# Altium PCB MCU.PcbDoc (part 2 of 2)
Units mm, origin at the board's own origin, x right, y up, seen from the top; angles counter-clockwise.
Board outline 79.5 x 68.58 mm, 2 copper layers (Top Layer, Bottom Layer); 52 components, 35 nets, 217 pads, 51 vias.
Unrouted connection lines stored in the file: 1.
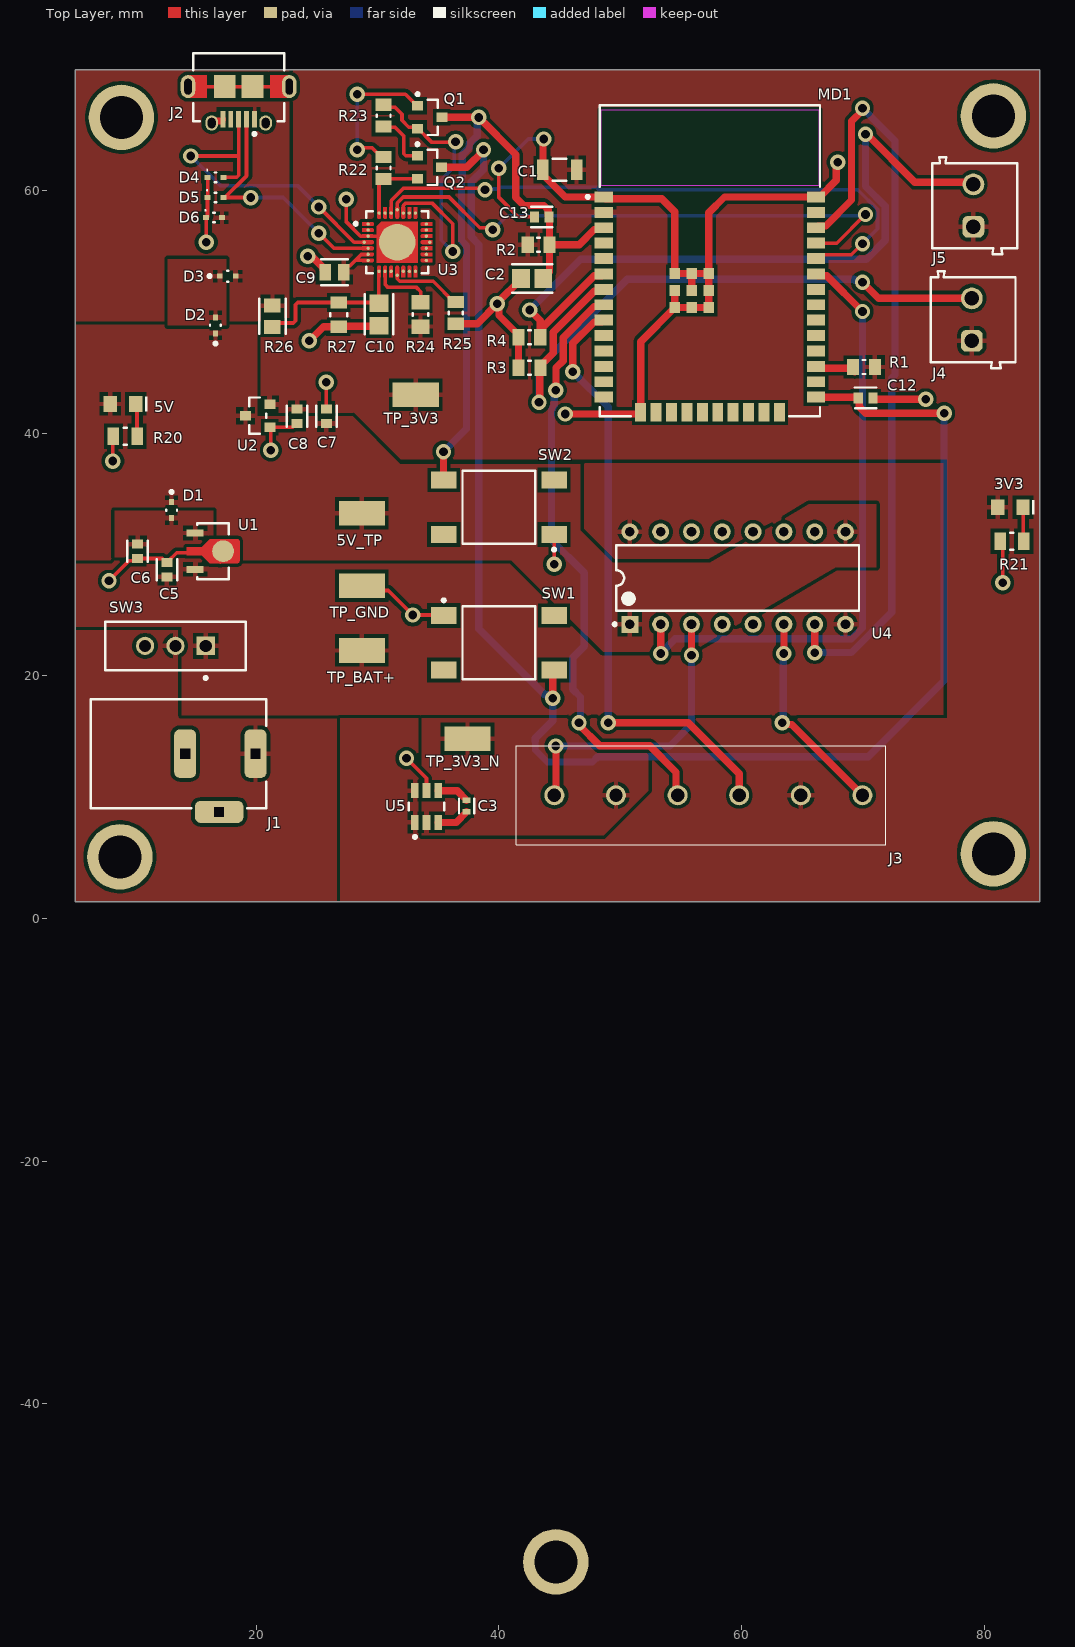
[diagram p0: Top Layer view]

## Part data (continued)
R24: library part CMP-2100-03671-1, "Chip Resistor, 1 KOhm, +/- 1%, 125 mW, -55 to 155 degC, 0805 (2012 Metric), RoHS, Tape and Reel", Case Code (Imperial)=0805, Case Code (Metric)=2012, Manufacturer=Yageo, Max Operating Temperature=155degC, Max Power Dissipation=125mW, Min Operating Temperature=-55degC, Package Description="2-Pin Surface Mounted Device, Body 2 x 1.25 mm", Package Height=0.5mm, Package Length=2mm, Package Quantity=1, Package Shape=Rectangular, Package Style=SMTMeter, Package Width=1.25mm, Rated Temperature=70°C, Resistance=1KOhm, Resistor Type="FIXED RESISTOR", Supplier Part Number=311-1.00KCRCT-ND, Temperature Coefficient=100ppm/degreesC, Tolerance=1%, Voltage Rating=150V, Additional Feature="LASER TRIMMABLE", Case/Package=0805, Category="Chip SMD Resistors", ComponentLink1Description=https://datasheet.ciiva.com:443/pdfs/VipMasterIC/IC/YAGO/YAGO-S-A0008145938/YAGO-S-A0008145938-1.pdf?src-supplier=IHS+Markit, ComponentLink1URL=https://datasheet.ciiva.com:443/pdfs/VipMasterIC/IC/YAGO/YAGO-S-A0008145938/YAGO-S-A0008145938-1.pdf?src-supplier=IHS+Markit, ComponentLink2Description=https://datasheet.ciiva.com/7941/1686128-7941719.pdf?src-supplier=Element14, ComponentLink2URL=https://datasheet.ciiva.com/7941/1686128-7941719.pdf?src-supplier=Element14, ComponentLink3Description=https://datasheet.ciiva.com/46385/444164-46385020.pdf?src-supplier=Element14, ComponentLink3URL=https://datasheet.ciiva.com/46385/444164-46385020.pdf?src-supplier=Element14, ComponentLink4Description=https://datasheet.ciiva.com/2456/pyu-r-int-thick-7-2456976.pdf?src-supplier=Digikey, ComponentLink4URL=https://datasheet.ciiva.com/2456/pyu-r-int-thick-7-2456976.pdf?src-supplier=Digikey, ComponentLink5Description=https://datasheet.ciiva.com/2456/pyu-r-int-thick-7-2456977.pdf?src-supplier=Digikey, ComponentLink5URL=https://datasheet.ciiva.com/2456/pyu-r-int-thick-7-2456977.pdf?src-supplier=Digikey, ComponentLink6Description=https://datasheet.ciiva.com/2456/pyu-r-int-thick-7-2456975.pdf?src-supplier=Digikey, ComponentLink6URL=https://datasheet.ciiva.com/2456/pyu-r-int-thick-7-2456975.pdf?src-supplier=Digikey, ComponentLink7Description=https://datasheet.ciiva.com/16850/rc0805-16850409.pdf?src-supplier=Future+Electronics, ComponentLink7URL=https://datasheet.ciiva.com/16850/rc0805-16850409.pdf?src-supplier=Future+Electronics, Composition=ThickFilm, Construction=Chip, Datasheet URL=http://www.yageo.com/NewPortal/yageodocoutput?fileName=/pdf/R-Chip/PYu-RC_Group_51_RoHS_L_5.pdf, Datasheet Version="Rev. 5, 10/2016", Depth=1.25mm, Height=0.024inch, JESD-609 Code=e3, Lead Free=LeadFree, Length=0.079inch, Manufacturer Part Number=RC0805FR-071KL, Manufacturer URL=http://www.yageo.com/, Military Standard=Not, Mounting Technology="Surface Mount", Number of Pins=2, Number of Terminations=2, Package Reference=0805, Packaging=TapeandReel, Pins=2, Power=125mW, Power Rating=125mW, Pricing="1=0.1, 10=0.025, 50=0.016, 100=0.0133, 500=0.00912, 1000=0.00787 (USD)", REACH SVHC=Unknown, Reach SVHC Compliant=Yes, RoHS=Yes, RoHS Compliant=Yes, RoHSCompliant=true, Stock=3362703, Supplier=Digikey, Technology="METAL GLAZE/THICK FILM", Terminal Finish=Nickel, Termination=SMD/SMT, Voltage Rating (DC)=150V, Width=0.049inch, Working Voltage=150V
R26: library part CMP-26527-001411-1, "22.1kΩ ±1% 0.125W 0805 Thick Film Chip Resistor AEC-Q200 compliant", Case Code (Imperial)=0805, Case Code (Metric)=2012, Manufacturer="Stackpole Electronics", Max Operating Temperature=155°C, Max Power Dissipation=125mW, Min Operating Temperature=-55°C, Package Height=0.5mm, Package Length=2mm, Package Shape=Rectangular, Package Style=SMTMeter, Package Width=1.25mm, Rated Temperature=70°C, Resistance=22.1kR, Resistor Type="Thick Film", Supplier Part Number=RMCF0805FT22K1CT-ND, Temperature Coefficient=100ppm/°C, Tolerance=1%, Working Voltage=150V, Case/Package=0805, Category="Chip SMD Resistors", ComponentLink1Description=https://datasheet.ciiva.com:443/pdfs/VipMasterIC/IC/SEIE/SEIE-S-A0009541969/SEIE-S-A0009541969-1.pdf?src-supplier=IHS+Markit, ComponentLink1URL=https://datasheet.ciiva.com:443/pdfs/VipMasterIC/IC/SEIE/SEIE-S-A0009541969/SEIE-S-A0009541969-1.pdf?src-supplier=IHS+Markit, ComponentLink2Description=https://datasheet.ciiva.com/15193/getdatasheetpartid-409700-15193558.pdf?src-supplier=Verical, ComponentLink2URL=https://datasheet.ciiva.com/15193/getdatasheetpartid-409700-15193558.pdf?src-supplier=Verical, Construction=Rectangular, Contact Plating=Tin, Depth=1.25mm, Features="Automotive AEC-Q200", Height=0.026inch, JESD-609 Code=e3, Lead Free="Lead Free", Length=0.079inch, Manufacturer Part Number=RMCF0805FT22K1, Military Standard=Not, Mount="Surface Mount", Mounting Technology="Surface Mount", Number of Terminations=2, Packaging="Tape and Reel", Pins=2, Power=125mW, Power Rating=125mW, Pricing="1=0.1, 10=0.02, 50=0.0124, 100=0.0103, 500=0.007, 1000=0.00601 (USD)", Radiation Hardening=No, Reach SVHC Compliant=Yes, Reference Standard=AEC-Q200, RoHS=Yes, RoHS Compliant=Yes, Series=RMCF, Size Code=0805, Stock=745768, Supplier=Digikey, Technology="METAL GLAZE/THICK FILM", Terminal Finish=Nickel, Termination=Wraparound, Width=0.049inch
R27: library part CMP-03211-007667-1, "SMD Chip Resistor, Thin Film, 47.5KΩ, 100 V, 0805 [2012 Metric], 100 mW, 0.1%, RN73 Series", Case/Package=0805, Manufacturer="TE Connectivity", Manufacturer Series=RN73, Max Operating Temperature=125°C, Min Operating Temperature=-55°C, Package=RN732A, Package Shape=Rectangular, Power=100mW, Power Rating=0.1W, Rated Temperature=70°C, Resistance=47.5KΩ, Resistor Type="FIXED RESISTOR", Supplier Part Number=A119902CT-ND, Temperature="-55°C to 155°C", Temperature Coefficient=10ppm/°C, Temperature Range High=155°C, Tolerance=0.1%, Voltage Rating=100V, Additional Feature=PRECISION, Automotive=No, Category=Res, ComponentLink1Description=https://datasheet.ciiva.com:443/pdfs/VipMasterIC/IC/TYEC/TYECS00448/TYECS00448-1.pdf?src-supplier=IHS+Markit, ComponentLink1URL=https://datasheet.ciiva.com:443/pdfs/VipMasterIC/IC/TYEC/TYECS00448/TYECS00448-1.pdf?src-supplier=IHS+Markit, ComponentLink2Description=Datasheet, ComponentLink2URL=https://www.te.com/commerce/DocumentDelivery/DDEController?Action=showdoc&DocId=Data+Sheet%7F1773270%7FP%7Fpdf%7FEnglish%7FENG_DS_1773270_P.pdf%7F1676162-2, ComponentLink3Description=https://datasheet.ciiva.com/2547/eng-ds-1773270-m-2547934.pdf?src-supplier=Digikey, ComponentLink3URL=https://datasheet.ciiva.com/2547/eng-ds-1773270-m-2547934.pdf?src-supplier=Digikey, Composition="Thin Film", Device Class L1="Passive Components", Device Class L2=Resistors, Device Class L3="Chip SMD Resistors", Height=0.65mm, Ipc Land Pattern Name=RESC200125X55, Lead Free=Yes, Manufacturer Part Number=RN73C2A47K5BTD, Mounting Technology="Surface Mount", Octopart=https://octopart.com/rn73c2a47k5btd-te+connectivity-22736876, octopart_url=https://octopart.com/rn73c2a47k5btd-te+connectivity-22736876, Packaging="5000 Reel", Pins=2, Pricing="1=0.73, 10=0.521, 50=0.3986, 100=0.3526, 500=0.26204, 1000=0.22944 (USD)", RoHS=TRUE, RoHS Compliant=Yes, Series=RN73, Stock=2760, Supplier=Digikey, Technology="THIN FILM", Temperature Range Low=-55°C, Termination=Wraparound, Working Voltage=100V
SW1 SW2: library part CMP-2000-07486-1, "Micro Miniature Push Button Switch FSM JSM, 50 mA, -35 to 85 degC, 4-Pin SMD, RoHS, Tape and Reel", Capacitance=0f, Case\/Package=SMD/SMT, Contact Current Rating=50mA, Contact DC Max Rating R Load=.05A@12VDC, Contact Resistance=100mOhm, Contact Voltage(DC)-Max=12V, Manufacturer="TE Connectivity", Max Operating Temperature=85degC, Min Operating Temperature=-35degC, Operating Force=160gf, Operating Force-Max=2.06N, Package Description="4-Pin Surface Mount Device, Body 6 x 6 mm, Pitch 4.5 mm", Package Quantity=1200, Supplier Part Number=450-1759-1-ND, Voltage Rating (DC)=24V, Actuator Length=0.055inch, Actuator Material=Polyamide, Body Breadth=6inch, Body Height=3.6mm, Body Length or Diameter=6mm, Category="Pushbutton Switches", Circuit Configuration=1X1, ComponentLink1Description=https://datasheet.ciiva.com:443/pdfs/VipMasterIC/IC/TYEL/TYEL-S-A0008743874/TYEL-S-A0008712894-1.pdf?src-supplier=IHS+Markit, ComponentLink1URL=https://datasheet.ciiva.com:443/pdfs/VipMasterIC/IC/TYEL/TYEL-S-A0008743874/TYEL-S-A0008712894-1.pdf?src-supplier=IHS+Markit, ComponentLink2Description=https://datasheet.ciiva.com/5801/eng-cd-2-1437565-7-u2-5801346.pdf?src-supplier=Farnell, ComponentLink2URL=https://datasheet.ciiva.com/5801/eng-cd-2-1437565-7-u2-5801346.pdf?src-supplier=Farnell, ComponentLink3Description=https://datasheet.ciiva.com/23765/1486934-23765878.pdf?src-supplier=Newark, ComponentLink3URL=https://datasheet.ciiva.com/23765/1486934-23765878.pdf?src-supplier=Newark, ComponentLink4Description=https://datasheet.ciiva.com/1530/1683375-1530944.pdf?src-supplier=Element14, ComponentLink4URL=https://datasheet.ciiva.com/1530/1683375-1530944.pdf?src-supplier=Element14, ComponentLink5Description=https://datasheet.ciiva.com/16320/eng-cs-1308111-1-switches-core-program-catalog-0308-16320065.pdf?src-supplier=Future+Electronics, ComponentLink5URL=https://datasheet.ciiva.com/16320/eng-cs-1308111-1-switches-core-program-catalog-0308-16320065.pdf?src-supplier=Future+Electronics, ComponentLink6Description=https://datasheet.ciiva.com/7638/921681-7638037.pdf?src-supplier=Element14, ComponentLink6URL=https://datasheet.ciiva.com/7638/921681-7638037.pdf?src-supplier=Element14, Contact Current(DC)-Max=50mA, Contact Material=CopperAlloy, Contact Plating=Silver, Current Rating=50mA, Datasheet URL=http://www.te.com/commerce/DocumentDelivery/DDEController?Action=showdoc&DocId=Customer+Drawing%7F2-1437565-7%7FV%7Fpdf%7FEnglish%7FENG_CD_2-1437565-7_V.pdf%7F4-1437565-2, Datasheet Version="Rev. V, 02/2015", Electrical Life=100000Cycles, Illumination Type=Illuminated, JESD-609 Code=e4, Manufacturer Part Number=FSM4JSMATR, Manufacturer URL=http://www.te.com/, Max Voltage Rating (DC)=12V, Mechanical Life=100000Cycles, Mount=SurfaceMount, Mounting Technology=SurfaceMount, Number of Switches=1, Orientation=Straight, Package Reference=FSM4JSMATR, Packaging=TapeandReel, Pricing="1=0.36, 10=0.351, 25=0.33, 100=0.2866, 250=0.26, 500=0.24188 (USD)", REACH SVHC=Unknown, Reach SVHC Compliant=Yes, RoHS=Yes, RoHS Compliant=Yes, RoHSCompliant=true, Stock=69097, Supplier=Digikey, Switch Action=MOMENTARY-TACTILE, Switch Function=SPST, Switch Travel=0.25mm, Switch Type=Keypad, Terminal Finish=Silver, Termination=GullWing, Throw Configuration=SPST
SW3: library part CMP-1696-00002-1, "Slide Switch, 500 V, -20 to 70 degC, 3-Pin THD, RoHS", Case\Package=SOT-23-5, Dropout Voltage="300 mV", Max Input Voltage="8 V", Max Operating Temperature="85 degC", Max Ouput Current="150 mA", Max Power Dissipation="250 mW", Min Input Voltage="4.3 V", Min Operating Temperature="-40 degC", Nominal Output Voltage="3.3 V", Package Quantity=3000, ComponentLink1Description="Manufacturer URL", ComponentLink1URL=http://www.e-switch.ch/en/, ComponentLink2Description=Datasheet, ComponentLink2URL=https://www.e-switch.com/system/asset/product_line/data_sheet/119/EG.pdf, DatasheetVersion=Oct-15, Height="1.3 mm", Length="3 mm", Mount="Surface Mount", Output Current="150 mA", Output Voltage="3.3 V", Outputs=1, PackageDescription="3-Pin Through Hole Device, Body 11.6 x 4 mm, Pitch 2.5 mm", PackageReference=EG1218, Packaging="Tape and Reel", Pins=5, Power Rating="250 mW", Radiation Hardening=No, REACH SVHC="No SVHC", RoHSCompliant=true, Width="1.8 mm"
U1: library part CMP-0244-00407-2, "IC REG LINEAR 5V 100MA SOT89-3", Case/Package=SOT-89, Dropout Voltage=1.7V, Input Voltage Absolute-Max=30V, Manufacturer=STMicroelectronics, Max Operating Temperature=125°C, Max Output Current=100mA, Max Supply Voltage=20V, Min Input Voltage=7V, Min Operating Temperature=0°C, Min Output Voltage=5V, Output Current1-Max=70mA, Output Voltage1-Max=5.25V, Output Voltage1-Min=4.75V, Output Voltage Accuracy=4%, Package Body Material=Plastic, Package Equivalence Code=TO-243, Package Quantity=1, Package Shape=Rectangular, Package Style="SMALL OUTLINEMeter", Peak Reflow Temperature (Cel)=260°C, Power Supply Rejection Ratio (PSRR)=49dB, Quiescent Current=6mA, Supplier Part Number=497-1183-1-ND, Time @ Peak Reflow Temperature-Max (s)=30s, Voltage Tolerance-Max=5%, Accuracy=4%, Adjustability=FIXED, Category="Voltage Regulators - Linear", Channels=1, ComponentLink1Description=https://datasheet.ciiva.com:443/pdfs/VipMasterIC/IC/SGST/SGST-S-A0002857926/SGST-S-A0002857926-1.pdf?src-supplier=IHS+Markit, ComponentLink1URL=https://datasheet.ciiva.com:443/pdfs/VipMasterIC/IC/SGST/SGST-S-A0002857926/SGST-S-A0002857926-1.pdf?src-supplier=IHS+Markit, ComponentLink2Description=https://datasheet.ciiva.com/1511/1868798-1511940.pdf?src-supplier=Element14, ComponentLink2URL=https://datasheet.ciiva.com/1511/1868798-1511940.pdf?src-supplier=Element14, ComponentLink3Description=https://datasheet.ciiva.com/22710/1868798-22710940.pdf?src-supplier=Element14, ComponentLink3URL=https://datasheet.ciiva.com/22710/1868798-22710940.pdf?src-supplier=Element14, ComponentLink4Description=https://datasheet.ciiva.com/7992/1868798-7992600.pdf?src-supplier=Element14, ComponentLink4URL=https://datasheet.ciiva.com/7992/1868798-7992600.pdf?src-supplier=Element14, ComponentLink5Description=https://datasheet.ciiva.com/2041/cd00000446-2041791.pdf?src-supplier=Digikey, ComponentLink5URL=https://datasheet.ciiva.com/2041/cd00000446-2041791.pdf?src-supplier=Digikey, ComponentLink6Description=https://datasheet.ciiva.com/2041/cd00000446-2041790.pdf?src-supplier=Digikey, ComponentLink6URL=https://datasheet.ciiva.com/2041/cd00000446-2041790.pdf?src-supplier=Digikey, ComponentLink7Description=https://datasheet.ciiva.com/2041/cd00000446-2041792.pdf?src-supplier=Digikey, ComponentLink7URL=https://datasheet.ciiva.com/2041/cd00000446-2041792.pdf?src-supplier=Digikey, ComponentLink8Description=https://datasheet.ciiva.com/4882/cd00000446-355303-4882429.pdf?src-supplier=Mouser, ComponentLink8URL=https://datasheet.ciiva.com/4882/cd00000446-355303-4882429.pdf?src-supplier=Mouser, ComponentLink9Description=https://datasheet.ciiva.com/16393/cd00000446-16393708.pdf?src-supplier=Future+Electronics, ComponentLink9URL=https://datasheet.ciiva.com/16393/cd00000446-16393708.pdf?src-supplier=Future+Electronics, Contact Plating=Tin, Dropout Voltage1-Nom=1.7V, Height=1.6mm, Height - Seated (Max)=1.6mm, JESD-30 Code=R-PSSO-F3, JESD-609 Code=e3, Lead Free="Lead Free", Length=4.6mm, Line Regulation-Max=0.15%, Load Regulation-Max=0.06%, Manufacturer Part Number=L78L05ACUTR, Max Input Voltage=30V, Moisture Sensitivity Level=1, Mount="Surface Mount", Nominal Output Voltage=5V, Number of Outputs=1, Number of Pins=3, Number of Regulators=1, Operating Temperature, TJ-Max=125°C, Operating Temperature, TJ-Min=0°C, Output Current=100mA, Output Type=Fixed, Output Voltage=5V, Output Voltage1-Nom=5V, Packaging="Tape and Reel", Pins=3, Polarity=Positive, Pricing="1=0.54, 10=0.464, 25=0.4328, 100=0.3461, 250=0.32144, 500=0.27198, 1000=0.21016 (USD)", Qualification Status="Not Qualified", Radiation Hardening=No, REACH SVHC="No SVHC", Reach SVHC Compliant=Yes, Regulator Type="FIXED POSITIVE SINGLE OUTPUT STANDARD REGULATOR", RoHS=Yes, RoHS Compliant=Yes, Stock=92237, Supplier=Digikey, Surface Mount=Yes, Technology=BIPOLAR, Terminal Finish=Tin, Terminal Form=Flat, Terminal Pitch=1.495mm, Terminal Position=SINGLE, Weight=0.004603oz, Width=2.6mm
U2: library part CMP-12756-000008-1, "IC REG LINEAR 3.3V 150MA SOT23", Case/Package=TSSOP, Dropout Voltage=300mV, Input Voltage Absolute-Max=6.5V, Manufacturer="Diodes Inc.", Max Junction Temp=+85°C, Max Supply Voltage=6V, Min Input Voltage=2V, Nominal Supply Current=25uA, Operating Temperature, TJ-Max=85°C, Operating Temperature, TJ-Min=-40°C, Output Current=150mA, Output Current1-Max=100mA, Output Voltage=3.3V, Output Voltage1-Max=3.366V, Output Voltage1-Min=3.234V, Package=SOT23, Package Body Material=Plastic, Package Equivalence Code=TO-236, Package Shape=Rectangular, Package Style="SMALL OUTLINE, THIN PROFILE, SHRINK PITCHMeter", Peak Reflow Temperature (Cel)=260°C, Supplier Part Number=AP2120N-3.3TRG1DICT-ND, Temperature="-40°C to +85°C", Time @ Peak Reflow Temperature-Max (s)=30s, Voltage Tolerance-Max=2%, Accuracy Percentage=2%, Adjustability=FIXED, Automotive=No, Category=IC, Channels=1, ComponentLink1Description=https://datasheet.ciiva.com:443/pdfs/VipMasterIC/IC/DIOD/DIOD-S-A0008513436/DIOD-S-A0008513436-1.pdf?src-supplier=IHS+Markit, ComponentLink1URL=https://datasheet.ciiva.com:443/pdfs/VipMasterIC/IC/DIOD/DIOD-S-A0008513436/DIOD-S-A0008513436-1.pdf?src-supplier=IHS+Markit, ComponentLink2Description=Datasheet, ComponentLink2URL=https://www.diodes.com/assets/Package-Files/SOT23.pdf, ComponentLink3Description=https://datasheet.ciiva.com/29569/ap2120-29569979.pdf?src-supplier=Digikey, ComponentLink3URL=https://datasheet.ciiva.com/29569/ap2120-29569979.pdf?src-supplier=Digikey, ComponentLink4Description=https://datasheet.ciiva.com/29569/ap2120-29569977.pdf?src-supplier=Digikey, ComponentLink4URL=https://datasheet.ciiva.com/29569/ap2120-29569977.pdf?src-supplier=Digikey, ComponentLink5Description=https://datasheet.ciiva.com/30016/ap2120-30016809.pdf?src-supplier=Avnet, ComponentLink5URL=https://datasheet.ciiva.com/30016/ap2120-30016809.pdf?src-supplier=Avnet, ComponentLink6Description=https://datasheet.ciiva.com/29569/ap2120-29569978.pdf?src-supplier=Digikey, ComponentLink6URL=https://datasheet.ciiva.com/29569/ap2120-29569978.pdf?src-supplier=Digikey, Device Class L1="Integrated Circuits (ICs)", Device Class L2="Power Management ICs", Device Class L3="Voltage Regulators - Linear", Digikey Description="IC REG LINEAR 3.3V 150MA SOT23", Dropout Voltage1-Max=300mV, Dropout Voltage1-Nom=300mV, Footprint Url=https://www.diodes.com/assets/Package-Files/SOT23.pdf, Height=1.1mm, Height - Seated (Max)=1.2mm, Ipc Land Pattern Name=SOT92P240X102-3, JESD-30 Code=R-PDSO-G3, JESD-609 Code=e3, Lead Free=Yes, Length=2.9mm, Line Regulation-Max=0.016%, Load Regulation-Max=0.04%, Manufacturer Part Number=AP2120N-3.3TRG1, Min Supply Voltage=2V, Moisture Sensitivity Level=3, Mouser Description="AP2120 Series 3.3 V 0.15 A Surface Mount CMOS LDO Regulator - SOT23", Number of Outputs=1, Octopart=https://octopart.com/ap2120n-3.3trg1-diodes+inc.-30954573, Output Type=Fixed, Output Voltage1-Nom=3.3V, Packaging="Tape and Reel", Pins=3, Pricing="1=0.38, 10=0.281, 25=0.246, 100=0.1592, 250=0.1318, 500=0.10544, 1000=0.08084 (USD)", Qualification Status="Not Qualified", Reach SVHC Compliant=Yes, Regulator Type="FIXED POSITIVE SINGLE OUTPUT LDO REGULATOR", RoHS=TRUE, RoHS Compliant=Yes, Standoff Height=0.013mm, Stock=949628, Supplier=Digikey, Surface Mount=Yes, Technology=CMOS, Temperature Range High=+85°C, Temperature Range Low=-40°C, Terminal Finish=Tin, Terminal Form="Gull Wing", Terminal Pitch=0.95mm, Terminal Position=DUAL, Width=1.3mm
U3: library part CMP-08093-000007-1, "IC USB TO UART BRIDGE QFN28"
U4: library part CMP-2000-06524-1, "Push-Pull Four Channel Driver with Diode, 4.5 to 36 V, -40 to 150 degC, 16-Pin PDIP, RoHS, Tube", Current - Output / Channel=600mA, Current - Peak Output=1.2A, Manufacturer=STMicroelectronics, On-State Resistance=-, Operating Temperature=-40°C~150°C, Package / Case="16-DIP(0.300\",7.62mm)", Package Description="16-Pin Thru-Hole Dual-In-Line, Body 20 x 6.85 mm, Pitch 2.54 mm", Package Reference=DIP-16, Standard Package=25, Supplier Device Package=16-PowerDIP, Voltage - Supply=4.5V~36V, Category=IntegratedCircuits(ICs), Datasheet URL=http://www.st.com/st-web-ui/static/active/en/resource/technical/document/datasheet/CD00000059.pdf, Datasheet Version=07/2003, Dynamic Catalog=HalfBridge, Family=PMIC-MOSFET,BridgeDrivers-InternalSwitch, Input Type=Non-Inverting, Manufacturer URL=http://www.st.com/, Mounting Technology=ThroughHole, Mounting Type=ThroughHole, Number of Outputs=4, Other Names=497-2936-5, Other Related Documents=L293DViewAllSpecifications, Packaging=Tube, PartNumber=L293D, Series=-, Type=HalfBridge
U5: library part CMP-0475-00348-2, "IC REG CHARGE PUMP -3V TSOT23-6", Case/Package=SOT-23-6, Max Input Voltage=5.5V, Max Operating Temperature=85°C, Max Output Current=100mA, Min Input Voltage=3V, Min Operating Temperature=-40°C, Min Supply Voltage=2.3V, Operating Supply Current=25uA, Output Voltage=-3V, Package Quantity=2500, Switching Frequency=900kHz, Lead Free="Lead Free", Max Supply Voltage=5.5V, Number of Outputs=1, Number of Pins=6, Output Current=100mA, Output Type=Fixed, Packaging="Tape and Reel", Synchronous Rectifier=No

## Free pads (board coordinates)
  round 5.4 hole 3.55: 1(80.772,5.334) 2(44.7,-53.05) 2(80.772,66.167) 3(8.89,66.04) 4(8.763,5.08)

## Via types
v1: diameter 1.27, hole 0.711, Top Layer to Bottom Layer, 51 vias

## Nets (pads, with @x,y where several pads share a name; then routed paths per layer and width w, separated by ;. In a path a pad name is that pad's centre, name@x,y a point inside that pad or via, vN(x,y) a via of type N, cw(c..) or ccw(c..) an arc to the next point about the centre after c; other vN are vias at no path point)
3V3: 3V3.2 C1.1 C8.1 C9.1 J3.5 J4.1 J5.1 MD1.2 R1.2 R2.1 R24.2 TP_3V3.1 U2.2 U3.6 U3.7 U5.1 U5.6 | length 3.8
  Top Layer w0.3: C9.1 27.198,53.481 27.523,53.806 27.723,53.806 28.67,54.753 U3.6 ; 28.17,54.253 U3.7
3V3_N: J3.2 TP_3V3_N.1 U5.2
5V: 5V.2 5V_TP.1 C7.1 D1.1 D2.1 U2.3 U4.1 U4.9
5V_BAT: C6.1 D1.2 U1.1
5V_USB: D2.2 D3.1
BAT+: C5.1 SW3.1 TP_BAT+.1 U1.3 U4.8 U4.16
C_N: C3.2 U5.4 | length 2.7
  Top Layer w0.6: U5.4 36.568,10.541 37.338,9.771 C3.2
C_P: C3.1 U5.3 | length 2.7
  Top Layer w0.6: U5.3 36.488,7.921 37.338,8.771 C3.1
CP_VBUS: C10.1 R26.2 R27.2 U3.8 | length 13
  Top Layer w0.3: R26.2 21.643,49.088 23.053,49.088 23.241,49.276 23.241,50.608 23.417,50.784 30.054,50.784 C10.1 30.112,53.342 U3.8
DTR: Q2.2 R22.1 U3.28 | length 5.8
  Top Layer w0.3: U3.28 30.123,60.615 30.473,60.965 R22.1 30.509,60.981 Q2.2
DTR_GATE: Q1.1 R22.2 | length 12.5
  Top Layer w0.3: v1(28.334,63.389) 28.484,63.539 29.544,63.539 30.318,62.765 R22.2 ; v1(28.334,67.961) 32.298,67.961 33.253,67.006 Q1.1
  Bottom Layer w0.3: v1(28.334,63.389) v1(28.334,67.961)
EN: C2.1 C13.1 MD1.3 Q1.3 R2.2 SW2.4 | length 56.4
  Top Layer w0.6: Q1.3 35.311,66.048 38.346,66.048 41.402,62.992 41.402,59.436 42.049,58.789 43.719,58.789 44.07,58.438 44.07,57.914 C13.1 ; v1(35.433,38.481) 35.433,36.181 SW2.4 ; C2.1 43.672,52.81 44.18,53.318 R2.2 ; C13.1@44.18,57.804 R2.2 ; MD1.3 48.504,56.799 47.867,56.799 46.621,55.553 R2.2
  Bottom Layer w0.6: v1(35.433,38.481) 37.33,40.378 37.33,55.461 36.927,55.864 36.927,61.156 36.972,61.201 36.972,62.961 37.566,63.555 37.566,63.871 38.226,64.531 38.226,65.912 v1(38.354,66.04)
ENCODER_A: J3.3 MD1.8 | length 50.2
  Top Layer w0.6: v1(44.704,43.561) 44.704,45.393 45.301,45.99 45.301,47.883 47.867,50.449 48.504,50.449 MD1.8 ; v1(46.609,16.129) 46.609,15.948 48.325,14.232 52.443,14.232 54.61,12.065 54.61,10.287 J3.3
  Bottom Layer w0.6: v1(44.704,43.561) 44.576,43.433 44.576,42.305 44.442,42.171 44.442,42.075 44.335,41.968 44.335,31.205 47.043,28.497 47.043,22.436 46.101,21.494 46.101,18.902 46.736,18.267 46.736,16.256 v1(46.609,16.129)
ENCODER_B: J3.4 MD1.9 | length 50.1
  Top Layer w0.6: v1(46.101,45.085) 46.101,47.413 47.867,49.179 48.504,49.179 MD1.9 ; v1(49.022,16.129) 55.626,16.129 59.817,11.938 J3.4
  Bottom Layer w0.6: v1(46.101,45.085) 49.022,42.164 v1(49.022,16.129)
GND: C1.2 C2.2 C5.2 C6.2 C7.2 C8.2 C9.2 C10.2 C12.2 C13.2 D4.1 D5.1 D6.1 J1.2 J1.3 J2.5 J2.6 J2.7 J2.8 J2.9 J2.10 J2.11 MD1.1 MD1.15 MD1.38 MD1.39 R3.2 R4.2 R20.2 R21.2 R25.1 R27.1 SW1.1 SW2.1 TP_GND.1 U1.2 U2.1 U3.3 U3.29 U4.4 U4.5 U4.12 U4.13 U5.5 | length 160.8
  Top Layer w0.3: v1(7.856,27.833) 9.528,29.505 10.052,29.505 C6.2 ; v1(8.183,37.713) R20.2@8.183,39.704 ; C6.2@10.146,29.674 12.235,29.674 12.559,29.35 C5.2 13.439,30.155 U1.2@16.962,30.155 ; J2.11 J2.10 J2.9 J2.8 ; v1(15.875,55.753) 15.863,55.765 15.863,57.772 D6.1 15.89,57.785 15.984,57.879 D5.1 15.987,59.448 15.987,61.1 D4.1 ; 17.018,29.394 U1.2@17.018,30.099 ; v1(21.209,38.608) 21.209,40.413 U2.1 22.995,40.504 23.293,40.802 C8.2 ; C7.2 v1(25.781,44.196) ; v1(27.432,59.309) 27.432,57.424 28.603,56.253 U3.3 31.123,56.253 U3.29 ; TP_GND.1 29.098,27.036 30.876,27.036 v1(32.893,25.019) 35.419,25.019 SW1.1 ; v1(32.385,13.208) 34.036,11.557 U5.5 ; v1(40.005,61.849) 40.005,59.436 41.602,57.839 C13.2 ; C2.2@41.418,53.161 C2.2 ; SW2.1 44.577,31.637 v1(44.577,29.21) ; MD1.15@51.56,41.595 MD1.15 ; C12.2 C12.2@70.958,42.799 ; R21.2 81.534,30.902 v1(81.534,27.686)
  Top Layer w0.5: J2.5@17.199,65.793 17.249,65.842 J2.5
  Top Layer w0.6: J2.7 16.486,65.742 17.149,65.742 J2.5@17.199,65.793 ; v1(24.257,54.61) 24.385,54.482 24.697,54.482 25.523,53.656 25.523,53.456 C9.2 ; v1(24.384,47.625) 25.543,48.784 R27.1 26.842,48.829 30.067,48.829 C10.2 ; R25.1 38.232,49.027 v1(39.878,50.673) ; R3.2 41.624,45.398 41.624,47.927 R4.2 41.618,48.108 40.006,49.72 40.006,50.545 v1(39.878,50.673) ; C2.2 41.82,52.708 39.878,50.766 v1(39.878,50.673) ; v1(43.688,64.262) 43.646,64.22 43.646,61.771 C1.2 43.605,61.354 45.47,59.489 MD1.1 48.804,59.339 53.437,59.339 54.504,58.272 54.504,53.169 MD1.39@55.904,53.169 ; v1(45.47,41.595) MD1.15@51.56,41.595 ; MD1.15 51.694,47.559 MD1.39@54.504,50.369 ; MD1.39@54.504,51.769 MD1.39@54.504,50.369 ; MD1.39@55.904,51.769 MD1.39@55.904,53.169 ; MD1.38 58.6,59.489 57.304,58.193 MD1.39@57.304,53.169 ; MD1.38@66.454,59.489 67.817,60.852 67.817,62.229 v1(67.945,62.357) ; C12.2@70.958,42.799 v1(75.184,42.799) ; MD1.39@54.504,50.369 55.904,50.369 57.304,50.369 57.304,51.769 MD1.39@57.304,53.169 ; MD1.39@55.904,53.169 MD1.39@57.304,53.169
  Bottom Layer w0.3: v1(40.005,61.849) 42.418,64.262 v1(43.688,64.262)
IO0: C12.1 MD1.25 Q2.3 SW1.4 | length 130.4
  Top Layer w0.6: Q2.3 37.366,61.931 38.735,63.3 v1(38.735,63.373) ; v1(44.45,18.161) 44.45,20.378 SW1.4 ; MD1.25 69.578,42.979 C12.1@69.578,42.904 ; C12.1 69.706,42.851 69.706,42.181 70.231,41.656 v1(76.708,41.656)
  Bottom Layer w0.553: 43.005,14.597 43.005,13.891 43.993,12.903 47.722,12.903
  Bottom Layer w0.6: v1(38.735,63.373) 38.735,61.738 37.727,60.73 37.727,56.195 38.354,55.568 38.354,23.876 43.774,18.456 43.974,18.456 44.269,18.161 v1(44.45,18.161) 44.45,16.3 43.005,14.855 43.005,14.597 ; 47.722,12.903 48.162,13.343 70.447,13.343 76.708,19.604 v1(76.708,41.656)
MCU_PWM_B: MD1.36 U4.7 | length 64.7
  Top Layer w0.6: v1(66.04,21.922) U4.7 ; MD1.36 66.304,57.099 66.941,57.099 69.08,59.238 69.08,65.724 69.977,66.621 v1(69.977,66.802)
  Bottom Layer w0.6: v1(66.04,21.922) 69.073,21.922 72.398,25.247 72.398,44.546 72.666,44.814 72.666,64.113 v1(69.977,66.802)
MCU_PWM_F: MD1.33 U4.2 | length 51.1
  Top Layer w0.6: v1(53.34,21.844) U4.2 ; MD1.33 66.304,52.989 67.026,52.989 v1(69.977,50.038)
  Bottom Layer w0.6: v1(53.34,21.844) 54.553,23.057 69.077,23.057 69.977,23.957 v1(69.977,50.038)
MOTOR_NEG: J3.6 U4.6 | length 17.3
  Top Layer w0.6: v1(63.373,16.129) 63.501,16.001 64.136,16.001 J3.6 ; v1(63.5,21.844) U4.6
  Bottom Layer w0.6: v1(63.373,16.129) 63.436,16.192 63.436,21.78 v1(63.5,21.844)
MOTOR_POS: J3.1 U4.3 | length 24.3
  Top Layer w0.6: J3.1 44.704,10.287 v1(44.704,14.224) ; v1(55.88,21.717) U4.3
  Bottom Layer w0.6: v1(44.704,14.224) 54.102,14.224 55.88,16.002 v1(55.88,21.717)
Net3V3_1: 3V3.1 R21.1 | length 2.8
  Top Layer w0.3: 3V3.1 83.219,31.167 R21.1
Net5V_1: 5V.1 R20.1 | length 2.7
  Top Layer w0.3: 5V.1 10.174,42.311 R20.1
NetJ1_1: J1.1 SW3.2
NetMD1_27: MD1.27 R1.1 | length 3.4
  Top Layer w0.6: MD1.27 66.304,45.369 69.131,45.369 69.331,45.169 R1.1@69.331,45.085
NetR24_1: R24.1 U3.9 | length 5.2
  Top Layer w0.3: U3.9 30.623,52.262 30.857,52.028 33.218,52.028 33.572,51.674 33.572,50.831 R24.1
NetR25_2: R25.2 U3.11 | length 5.9
  Top Layer w0.3: U3.11 31.623,52.733 31.828,52.528 34.586,52.528 36.287,50.827 R25.2
PRESSURE_PAD_1: J4.2 MD1.7 R3.1 | length 54
  Top Layer w0.6: v1(43.307,42.545) 43.368,42.606 43.368,45.332 R3.1 ; R3.1@43.429,45.568 44.478,46.617 44.478,48.33 47.867,51.719 48.504,51.719 MD1.7 ; v1(69.977,52.451) 71.303,51.125 J4.2
  Bottom Layer w0.6: v1(43.307,42.545) 43.307,45.42 50.592,52.705 69.291,52.705 69.416,52.579 69.849,52.579 v1(69.977,52.451)
PRESSURE_PAD_2: J5.2 MD1.6 R4.1 | length 61.2
  Top Layer w0.6: v1(42.545,50.165) 43.418,49.292 R4.1 R4.1@43.455,47.97 ; 43.618,48.74 47.867,52.989 48.504,52.989 MD1.6 ; v1(70.231,64.643) 70.358,64.643 74.295,60.706 78.938,60.706 J5.2
  Bottom Layer w0.6: v1(42.545,50.165) 46.736,54.356 70.312,54.356 71.866,55.91 71.866,58.716 70.231,60.351 v1(70.231,64.643)
RTS: Q1.2 R23.2 U3.24 | length 25.2
  Top Layer w0.3: R23.2 30.691,66.885 31.442,66.885 32.017,66.31 32.017,65.802 32.579,65.24 33.169,65.24 Q1.2 33.353,65.106 34.451,64.008 36.414,64.008 v1(36.431,64.026) ; U3.24 32.123,58.773 32.328,58.978 34.494,58.978 36.195,57.277 v1(36.195,54.991)
  Bottom Layer w0.3: v1(36.195,54.991) 35.261,55.925 35.261,60.888 36.322,61.949 36.322,63.916 v1(36.431,64.026)
RTS_GATE: Q2.1 R23.1 | length 4.6
  Top Layer w0.3: R23.1 30.542,65.234 31.442,65.234 32.166,64.51 32.166,63.057 32.342,62.881 Q2.1
RXD0: MD1.35 U3.25 | length 46.1
  Top Layer w0.3: U3.25 31.623,58.98 32.121,59.478 35.899,59.478 38.422,56.955 39.311,56.955 v1(39.497,56.769) ; MD1.35 67.85,55.679 70.21,58.039 v1(70.231,58.039)
  Bottom Layer w0.3: v1(39.497,56.769) 40.671,57.943 70.135,57.943 v1(70.231,58.039)
TXD0: MD1.34 U3.26 | length 50
  Top Layer w0.246: 31.096,58.292 31.123,58.319
  Top Layer w0.3: 31.123,58.319 31.123,59.187 32.134,60.198 38.735,60.198 v1(38.862,60.071) ; MD1.34 66.454,54.709 69.06,54.709 v1(69.977,55.626)
  Bottom Layer w0.3: v1(38.862,60.071) 38.935,60.144 39.947,60.144 40.097,60.294 48.048,60.294 48.259,60.083 69.58,60.083 71.216,58.447 71.216,56.865 v1(69.977,55.626)
USB_DM: D5.2 J2.2 U3.5 | length 21
  Top Layer w0.3: J2.2 19.199,61.222 17.471,59.494 17.354,59.494 D5.2 17.308,59.44 19.554,59.44 v1(19.558,59.436) ; v1(25.164,56.495) 26.406,55.253 U3.5
  Bottom Layer w0.3: v1(19.558,59.436) 22.223,59.436 v1(25.164,56.495)
USB_DP: D4.2 J2.3 U3.4 | length 27.1
  Top Layer w0.3: v1(14.605,62.865) 18.549,62.865 ; D4.2 18.373,61.103 18.549,61.279 18.549,62.865 ; J2.3 18.549,62.865 ; v1(25.164,58.654) 28.065,55.753 U3.4
  Bottom Layer w0.3: v1(14.605,62.865) 17.049,60.421 23.397,60.421 v1(25.164,58.654)
VBUS: D3.2 D6.2 J2.1 R26.1
pads on no net: J2.4 MD1.4 MD1.5 MD1.10 MD1.11 MD1.12 MD1.13 MD1.14 MD1.16 MD1.17 MD1.18 MD1.19 MD1.20 MD1.21 MD1.22 MD1.23 MD1.24 MD1.26 MD1.28 MD1.29 MD1.30 MD1.31 MD1.32 MD1.37 SW1.2 SW1.3 SW2.2 SW2.3 SW3.3 U3.1 U3.2 U3.10 U3.12 U3.13 U3.14 U3.15 U3.16 U3.17 U3.18 U3.19 U3.20 U3.21 U3.22 U3.23 U3.27 U4.10 U4.11 U4.14 U4.15

## Polygon pours and split planes (outlines as drawn)
5V_BAT on Top Layer "5V_BAT" (solid, remove dead copper, pour order 1): 16.444,33.611 16.444,31.557 14.688,29.801 8.322,29.801 8.322,33.611
3V3 on Top Layer "3V3" (solid, remove dead copper, pour order 8): 76.962,37.846 76.962,16.51 26.924,16.51 26.924,1.397 84.582,1.397 84.582,69.977 17.78,69.977 17.78,37.846
BAT+ on Top Layer "BAT+" (solid, remove dead copper, pour order 9): 13.843,16.764 13.843,24.067 5.08,24.067 5.08,29.716 39.613,29.718 39.37,37.719 76.835,37.719 76.835,16.764
NetJ1_1 on Top Layer "USB" (solid, remove dead copper, pour order 10): 5.08,24.067 21.336,24.067 21.336,16.569 30.011,16.569 30.011,5.635 30.011,1.397 5.08,1.397
5V_USB on Top Layer "5V_USB" (solid, remove dead copper, pour order 4): 12.706,48.895 17.526,48.895 17.526,54.356 12.706,54.356
5V on Top Layer "5V" (solid, remove dead copper, pour order 5): 5.08,29.547 5.08,48.937 20.066,48.937 20.066,41.402 27.94,41.402 31.877,37.465 46.729,37.465 46.729,32.011 49.403,29.337 57.404,29.337 65.564,34.163 71.12,34.163 71.12,28.956 67.772,28.956 55.857,21.971 48.589,21.971 41.013,29.547
VBUS on Top Layer "VBUS" (solid, remove dead copper, pour order 6): 5.08,69.977 5.08,49.149 22.733,49.149 22.733,51.308 22.733,69.977
3V3_N on Top Layer "3V3_N" (solid, remove dead copper, pour order 7): 33.655,16.51 33.655,6.858 48.641,6.858 52.324,10.541 52.324,16.51
GND on Bottom Layer "GND" (solid, remove dead copper, pour order 0): 5.08,69.977 84.582,69.977 84.582,1.397 5.08,1.397

## Text inside footprints (layer, text, board x,y; h text height)
J2: Mechanical 1 "PCB EDGE" at 12.849,69.58 h1 r180